# Altium PCB SPL1301 for Cal V1.0.PcbDoc
Units mil, origin at the board's own origin, x right, y up, seen from the top; angles counter-clockwise.
Board outline 521.84 x 521.84 mil, 2 copper layers (Top Layer, Bottom Layer); 6 components, 4 nets, 20 pads, 3 vias.
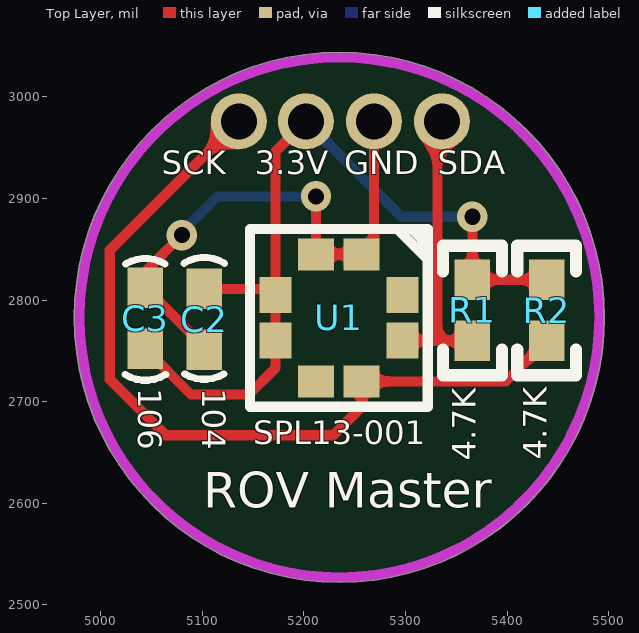
[diagram p0: Top Layer view]
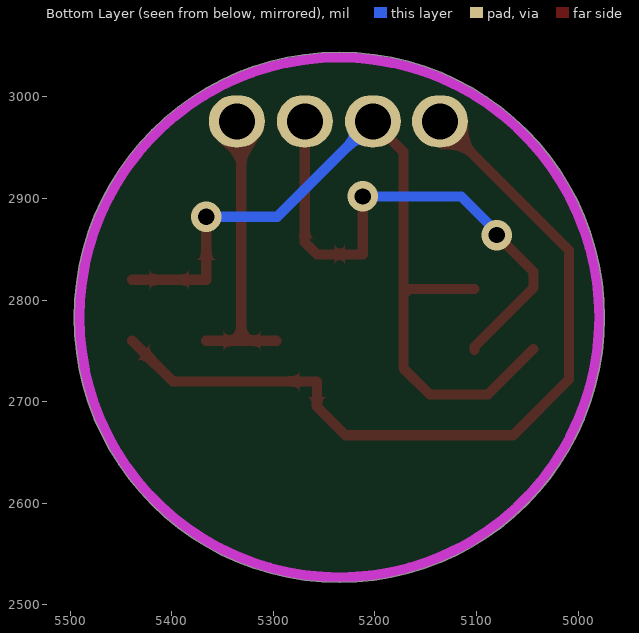
[diagram p1: Bottom Layer view, seen from below]
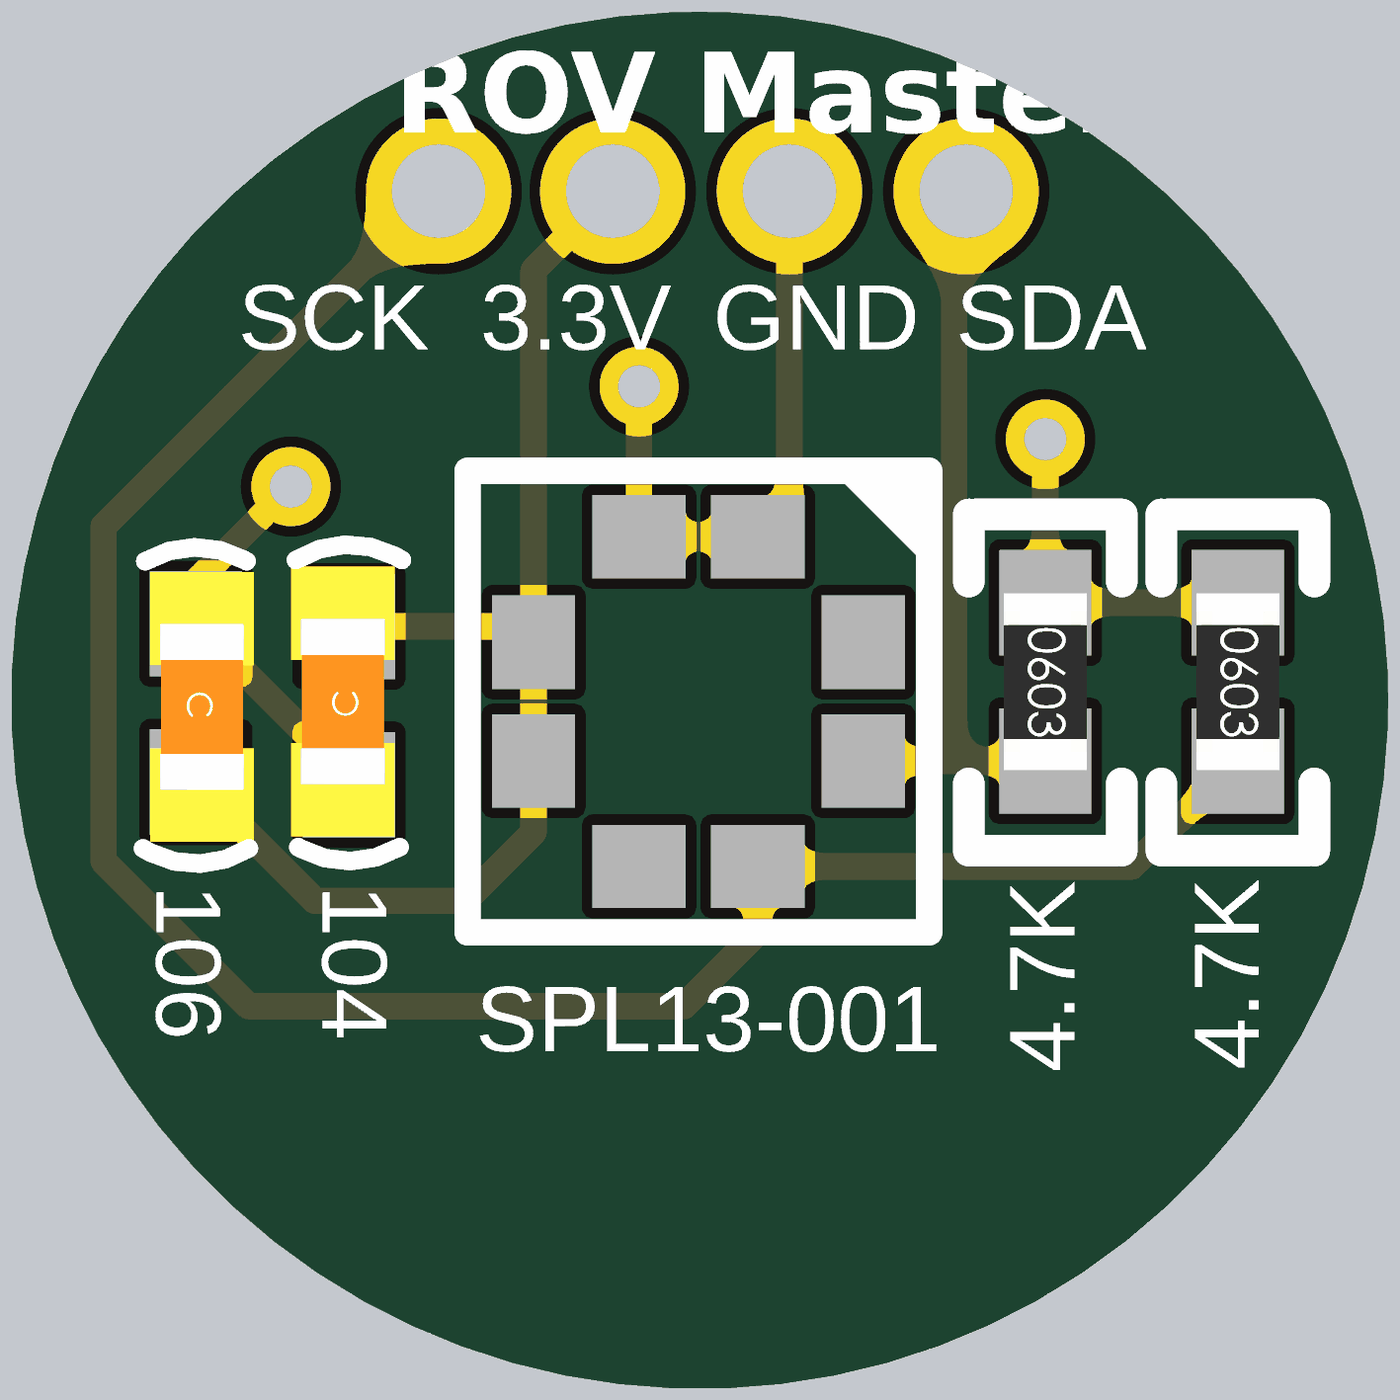
[diagram p2: 3D render of the assembled board from above, using the file's embedded part models]

## Layer stack, top to bottom
Top Solder: solder mask 0.4, Solder Resist, Dk 3.5
Top Layer: signal copper 1.4
Dielectric 1: dielectric 12.6, FR-4, Dk 4.8
Bottom Layer: signal copper 1.4
Bottom Solder: solder mask 0.4, Solder Resist, Dk 3.5

## Board outline
4974.08,2783 ccw(c5235,2783) 5235,2522.08 ccw(c5235,2783) 5495.92,2783 ccw(c5235,2783) 5235,3043.92 ccw(c5235,2783)

## Design rules (kind name [scope] priority, off if disabled: settings)
Clearance [All] p1: gap=8
PolygonConnect [All] p1: connectstyle=Relief reliefconductorwidth=10 reliefentries=4 polygonreliefangle="90 Angle" airgapwidth=10
RoutingVias [All] p1: holewidth=28 width=50 viastyle="Through Hole" minholewidth=28 minwidth=50 maxholewidth=28 maxwidth=50
SolderMaskExpansion [All] p1: expansion=4
Width [All] p1: maxlimit=210 minlimit=10 preferedwidth=10 toplayer_maxwidth=120 minimp=50.000000 maximp=50.000000 favimp=50.000000
30 further rules are at their usual default settings.

## Components (designator, comment, footprint, x,y, rotation, side; value= is the part's Value field where it differs from the comment)
C2 "104" 0603C 4820,2848 r90 top
C3 "106" 0603C 5326,2715 r270 top
R1 "4.7K" 0603R 5367,2818 r270 top
R2 "4.7K" 0603R 5440,2818 r270 top (schematic designator 4.7k)
U1 "SPL13-001" SPL13-001 5237,2790 r0 top
U3 "连接端子" 连接端子 5235.87,2933.03 r0 top

## Footprints (in the part's own frame and the unit in brackets; to place one, negate y for a bottom-side part, rotate by r counter-clockwise, add the part's x,y. Pads: shape width x height; smd on the part's side, far side on the other; paste and mask are expansions set on the pad)
0603C [mil]
  rect 40x35 smd: 1(-97,-282) 2(-37,-282)
  silkscreen extent -126,-302 -6,-262, body extent -117,-299 -14,-260, height 35
0603R [mil]
  rect 40x35 smd: 1(-2,-1) 2(58,-1)
  silkscreen extent -35,-30 92,28, body extent -5,-17 61,15, height 22
SPL13-001 [mm]
  rect 0.9x0.8 smd: 1(0.508,1.397) 2(-0.635,1.397) 5(-0.635,-1.778) 6(0.508,-1.778)
  rect 0.8x0.9 smd: 3(-1.651,0.381) 4(-1.651,-0.762) 8(1.524,0.381)
  rect 0.8x0.9 smd paste+0: 7(1.524,-0.762)
  silkscreen extent -2.29,-2.41 2.16,2.03
连接端子 [mm]
  round 1.4 / inner oval 1.4x1.3 / far side oval 1.4x1.3 hole 0.9 mask+0.102: 1(-2.537,1.091) 2(-0.86,1.091) 3(0.842,1.091) 4(2.543,1.091)

## Part data
C2 C3: library part Cap1, "无极贴片电容"
R1 R2: library part Res, "电阻"
U1: library part SPL13-001_1

## Via types
v1: diameter 30, hole 16, Top Layer to Bottom Layer, 3 vias

## Nets (pads, with @x,y where several pads share a name; then routed paths per layer and width w, separated by ;. In a path a pad name is that pad's centre, name@x,y a point inside that pad or via, vN(x,y) a via of type N, cw(c..) or ccw(c..) an arc to the next point about the centre after c; other vN are vias at no path point)
+3.3V: C2.2 C3.2 R1.1 R2.1 U1.3 U1.4 U3.2 | length 823.3
  Top Layer w10: C3.2 5089,2707 5146,2707 5172,2733 U1.4 U1.3 ; C2.2 5166,2811 U1.3 ; U3.2 5172,2946 U1.3 ; v1(5366,2882) R1.1 R2.1
  Bottom Layer w10: U3.2 5296,2882 v1(5366,2882)
GND: C2.1 C3.1 U1.1 U1.2 U3.3 | length 538.5
  Top Layer w10: v1(5080,2864) 5044,2828 C3.1 5102,2754 C2.1 ; v1(5212,2902) U1.2 U1.1 5269,2857 U3.3
  Bottom Layer w10: v1@5078.5,2865.5 5115,2902 v1(5212,2902)
SCK: R2.2 U1.6 U3.1 | length 812.6
  Top Layer w10: U3.1 5009,2849 5009,2722 5064,2667 5229,2667 5257,2695 U1.6 5399,2720 R2.2
SDA: R1.2 U1.7 U3.4 | length 286.9
  Top Layer w10: U1.7 5331.5,2760 ; U3.4 5331.5,2971.5 5331.5,2760 ; R1.2 5331.5,2760
pads on no net: U1.5 U1.8

## Keep-outs
Keep-Out Layer:
  circle w10: c5235,2783 r255.91

## Silkscreen, mask and mechanical layers (free items; w line width, h text height)
Top Overlay:
  lines w10: 5292,2870 5320,2842 ; 5308,2868 5322,2854 5322,2853
  text "SCK" at 5060,2916 h40
  text "3.3V" at 5151.75,2916 h40
  text "GND" at 5240,2916 h40
  text "SDA" at 5332,2916 h40
  text "ROV Master" at 5101,2584 h60